# Altium PCB pcb403.PcbDoc
Units mil, origin at the board's own origin, x right, y up, seen from the top; angles counter-clockwise.
Board outline 6000 x 4000 mil, 2 copper layers (Top Layer, Bottom Layer); 42 components, 24 nets, 116 pads, 22 vias.
Unrouted connection lines stored in the file: 20.
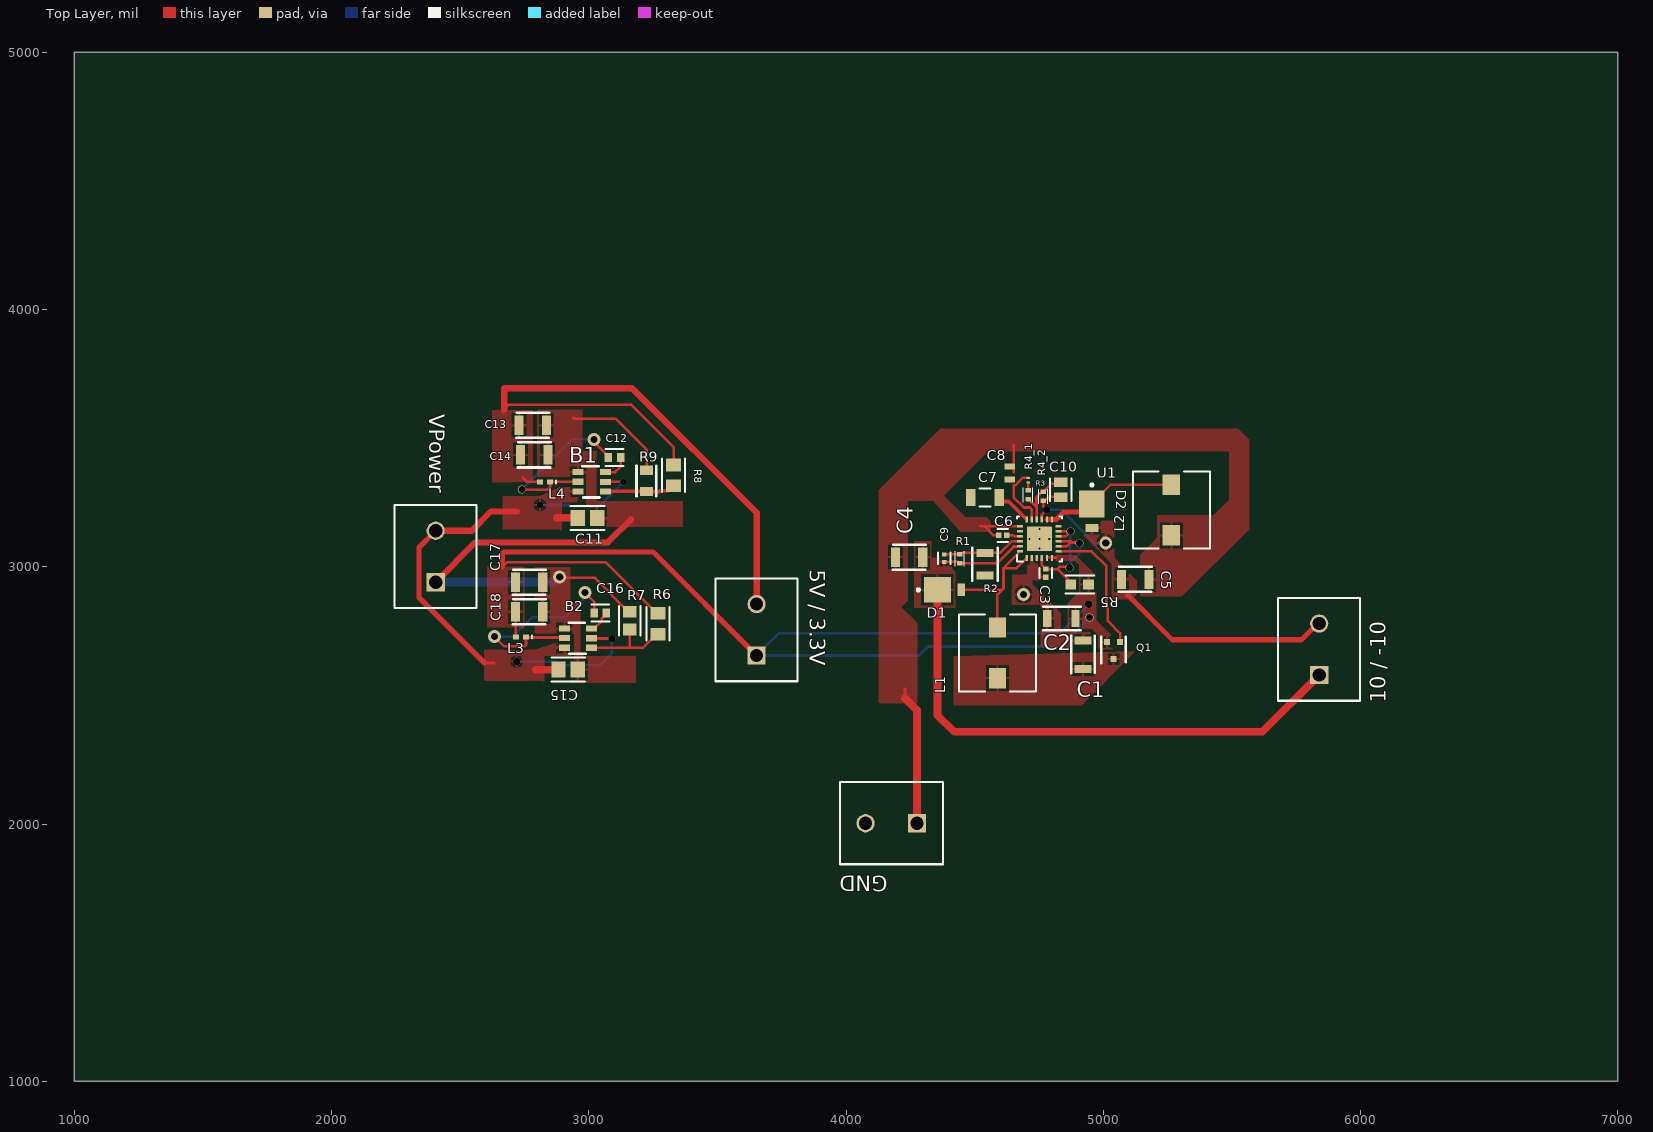
[diagram p0: Top Layer view]
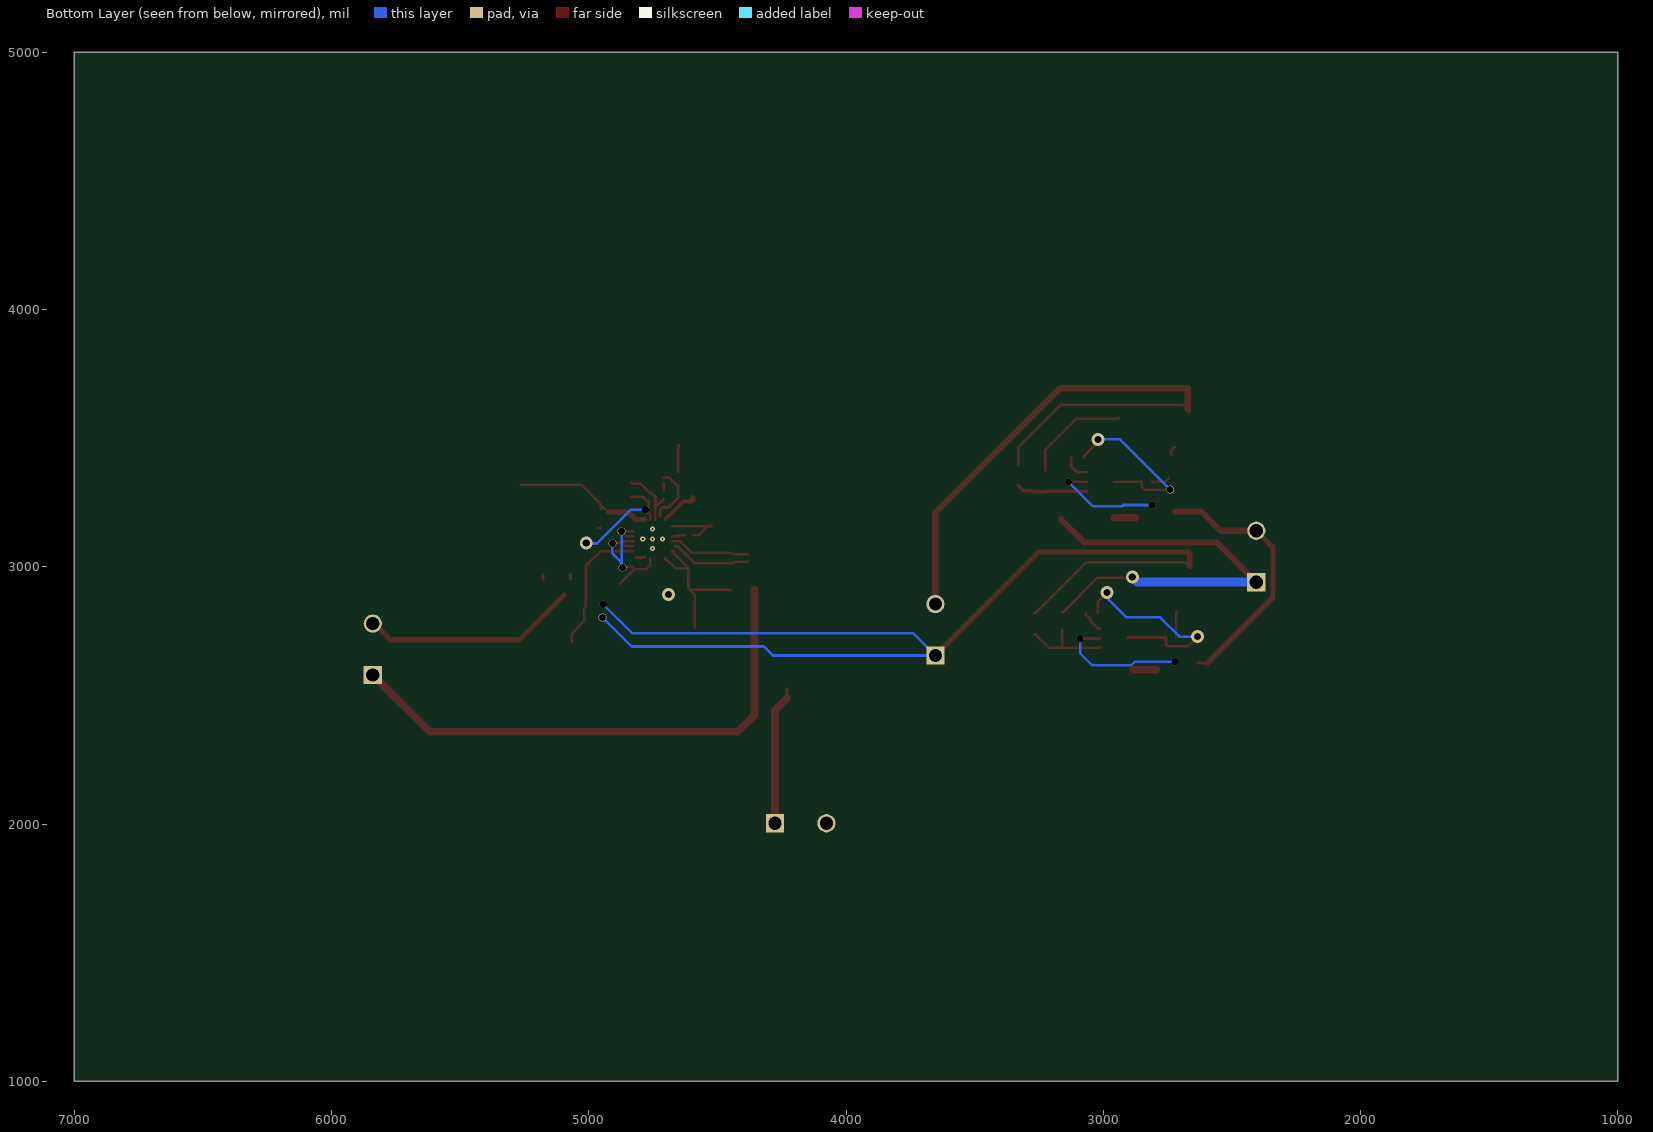
[diagram p1: Bottom Layer view, seen from below]

## Layer stack, top to bottom
Top Solder: solder mask 0.4, Solder Resist, Dk 3.5
Top Layer: signal copper 1.4
Dielectric 1: dielectric 12.6, FR-4, Dk 4.8
Bottom Layer: signal copper 1.4
Bottom Solder: solder mask 0.4, Solder Resist, Dk 3.5

## Board outline
1000,1000 7000,1000 7000,5000 1000,5000

## Design rules (kind name [scope] priority, off if disabled: settings)
Clearance [All] p1: gap=10 ignorepadtopadclearanceinfootprint=FALSE except(0: Arc-Hole Track-Hole SMDPad-Hole THPad-Hole Via-Hole Fill-Hole Poly-Hole Region-Hole Text-Hole)
PolygonConnect [All] p1: connectstyle=Relief reliefconductorwidth=10 reliefentries=4 polygonreliefangle="90 Angle" airgapwidth=10
RoutingVias [All] p1: holewidth=28 width=50 viastyle="Through Hole" minholewidth=28 minwidth=50 maxholewidth=28 maxwidth=50
SolderMaskExpansion [All] p1: expansion=4 istentingtop=FALSE
Width [All] p1: maxlimit=30 minlimit=5 preferedwidth=6 minimp=50.000000 maximp=50.000000 favimp=50.000000
30 further rules are at their usual default settings.

## Components (designator, comment, footprint, x,y, rotation, side; value= is the part's Value field where it differs from the comment)
"5V / 3.3V" "Comment" PHOE-1729128-2_V 3652.56,2754.92 r90 top
"10 / -10" "Comment" PHOE-1729128-2_V 5839.57,2679.13 r90 top
B1 "" PCBCOMPONENT_1 2958.7,3367.8 r0 top
B2 "" PCBCOMPONENT_1 2905,2760 r0 top
C1 "Comment" 4.7uF_C1206C475K3RACAUTO 4921.26,2712.6 r0 top
C2 "Comment" 4.7uF_C1206C475K3RACAUTO 4892.72,2799.21 r270 top
C3 "C0402C104K8PAC" FP-C0402-BB-MFG 4776.57,2975.39 r270 top value="0.10 μF"
C4 "Comment" Cap22uF_C1206C226M4PAC7800 4191.93,3037.4 r90 top
C5 "Comment" Cap22uF_C1206C226M4PAC7800 5177.17,2950.79 r270 top
C6 "C0402C103J4RAC" FP-C0402-BB-MFG 4609.25,3122.05 r180 top value="10,000 pF"
C7 "C1206C472J5GAC" FP-C1206C-EB-MFG 4540.35,3269.69 r180 top value="4,700 pF"
C8 "Comment" PCBComponent_1#1 4636.81,3389.99 r0 top
C9 "CGA1A2C0G1E6R8D030BA" FP-CGA1A-0_1-0_03-IPC_B 4381.73,3033.7 r90 top
C10 "C0805C759D5GACTU" FP-C0805C-DN-MFG 4834.65,3299.21 r270 top value="7.5 pF"
C11 "UMK212BBJ225MD-T" FP-0805-L_2_0_0_2-W_1_25-IPC_A 2995,3190 r0 top
C12 "C0603C104K4PAC7867" FP-C0603C-CF-MFG 3100,3425 r180 top value="0.10 μF"
C13 "Comment" Cap22uF_C1206C226M4PAC7800 2728.7,3550 r90 top
C14 "Comment" Cap22uF_C1206C226M4PAC7800 2735,3435 r90 top
C15 "UMK212BBJ225MD-T" FP-0805-L_2_0_0_2-W_1_25-IPC_A 2920,2600 r0 top
C16 "C0603C104K4PAC7867" FP-C0603C-CF-MFG 3045,2820 r0 top value="0.10 μF"
C17 "Comment" Cap22uF_C1206C226M4PAC7800 2715,2940 r90 top
C18 "Comment" Cap22uF_C1206C226M4PAC7800 2715,2825 r90 top
D1 "MBRM120ET3G" ONSC-POWERMITE-2-457-04_D_V 4407.87,2910.43 r0 top
D2 "MBRM120ET3G" ONSC-POWERMITE-2-457-04_D_V 4955.71,3190.94 r270 top
GND "Comment" PHOE-1729128-2_V 4176.18,2002.95 r180 top
L1 "7447789004" WE-PD-S-PB 4588.58,2665.35 r90 top
L2 "7447789004" WE-PD-S-PB 5264.76,3220.47 r90 top
L3 "MSS1260H-822MED" 0402-A 2736.22,2727.36 r180 top value=8.2uH
L4 "Inductor" 0402-A 2830,3330 r180 top value=10uH
Q1 "Comment" PCBComponent_1#2 5040.35,2707.68 r0 top
R1 "Comment" 1Mohm_ESR01MZPF1004 4441.73,3048.7 r0 top
R2 "Comment" 130k_RGV3216P-1303-B-T1 4540.35,3053.15 r0 top
R3 "Comment" 1Mohm_ESR01MZPF1004 4766.73,3291.34 r0 top
R4_1 "Comment" 121k_RE0201BRE07121KL 4707.68,3344.58 r0 top
R4_2 "Comment" 200ohm_ESR01MZPF2000 4707.68,3297.24 r0 top
R5 "AC0603FR-10100RL" FP-AC0603-IPC_A 4908.46,2931.1 r180 top
R6 "RK73G2ATTD1003F" FP-RK73G2A-IPC_A 3268.7,2778.54 r270 top
R7 "RMCF0805FG22K1" FP-RMCF0805-IPC_B 3159.45,2790.35 r270 top
R8 "RK73G2ATTD1003F" FP-RK73G2A-IPC_A 3330,3355 r90 top
R9 "Comment" RMCF0805FT13K7_13.7k 3225,3292.32 r180 top
U1 "TPS6513x" RGE0024B_V 4751.73,3108.7 r90 top
VPower "Comment" PHOE-1729128-2_V 2405,3040 r90 top

## Footprints (in the part's own frame and the unit in brackets; to place one, negate y for a bottom-side part, rotate by r counter-clockwise, add the part's x,y. Pads: shape width x height; smd on the part's side, far side on the other; paste and mask are expansions set on the pad)
1Mohm_ESR01MZPF1004 [mm]
  rect 0.55x0.45 smd: 7(0,0) 8(0,-0.9)
  silkscreen extent -0.45,-1.17 0.45,0.28
4.7uF_C1206C475K3RACAUTO [mm]
  rect 1.7x0.8 smd: 13(0,0) 14(0,-2.8)
  silkscreen extent -1.15,-3.2 1.17,0.5
121k_RE0201BRE07121KL [mm]
  rect 0.35x0.2 smd: 9(0,0) 10(0,-0.42)
130k_RGV3216P-1303-B-T1 [mm]
  rect 1.65x0.8 smd: 5(0,0) 6(0,-2.2)
  silkscreen extent -1.25,-2.75 1.25,0.5
200ohm_ESR01MZPF2000 [mm]
  rect 0.55x0.45 smd: 7(0,0) 8(0,-0.9)
  silkscreen extent -0.45,-1.17 0.45,0.28
0402-A [mm] "Chip Inductor, Body 1.0x0.5mm, IPC High Density"
  rect 0.6x0.5 smd: 1(-0.5,0) 2(0.5,0)
  silkscreen extent -1.1,-0.15 -1.1,0.15, body extent -0.55,-0.3 0.55,0.3, height 0.55
Cap22uF_C1206C226M4PAC7800 [mm]
  rect 1.9x0.9 smd: 7(0,0) 8(0,-2.7)
  silkscreen extent -1.25,-2.98 1.22,0.28
FP-0805-L_2_0_0_2-W_1_25-IPC_A [mil]
  rect 55.42x61.5 smd paste+0 mask+0: 1(-37.49,0) 2(37.49,0)
  silkscreen extent -65,-46 65,46, body extent -85,-50 85,50, height 10
FP-AC0603-IPC_A [mil]
  rect 41.68x39.85 smd paste+0 mask+0: 1(-34.52,0) 2(34.52,0)
  silkscreen extent -55,-36 55,36, body extent -75,-40 75,40, height 10
FP-C0402-BB-MFG [mm]
  rect 0.52x0.52 smd paste+0 mask+0: 1(-0.4,0) 2(0.4,0)
  silkscreen extent -0.5,-0.64 0.5,0.64, body extent -0.8,-0.4 0.8,0.4, height 0.25
FP-C0603C-CF-MFG [mm]
  rect 0.75x0.9 smd paste+0 mask+0: 1(-0.6,0) 2(0.6,0)
  silkscreen extent -0.87,-0.85 0.88,0.85, body extent -1.2,-0.6 1.2,0.6, height 0.25
FP-C0805C-DN-MFG [mm]
  rect 0.95x1.35 smd paste+0 mask+0: 1(-0.75,0) 2(0.75,0)
  silkscreen extent -1.1,-1.07 1.1,1.07, body extent -1.4,-0.85 1.4,0.85, height 0.25
FP-C1206C-EB-MFG [mm]
  rect 0.95x1.7 smd paste+0 mask+0: 1(-1.4,0) 2(1.4,0)
  silkscreen extent -0.55,-0.9 0.55,0.9, body extent -2,-1 2,1, height 0.25
FP-CGA1A-0_1-0_03-IPC_B [mil]
  rect 15.08x16.46 smd paste+0 mask+0: 1(-14.47,0) 2(14.47,0)
  silkscreen extent -22,-24 22,24, body extent -28,-14 28,14, height 10
FP-RK73G2A-IPC_A [mil]
  rect 49.42x57.56 smd paste+0 mask+0: 1(-40.37,0) 2(40.37,0)
  silkscreen extent -65,-45 65,45, body extent -85,-48 85,48, height 10
FP-RMCF0805-IPC_B [mil]
  rect 45.46x53.63 smd paste+0 mask+0: 1(-34.48,0) 2(34.48,0)
  silkscreen extent -57,-43 57,43, body extent -67,-37 67,37, height 10
ONSC-POWERMITE-2-457-04_D_V [mil] "POWERMITE, 2-Leads, Body 1.965x1.9mm"
  rect 105.12x100 smd: 1(-52.56,0)
  rect 30x50 smd: 2(40,0)
  silkscreen extent -132,-5 -122,5, body extent -80,-37 -3,37, height 45
PCBCOMPONENT_1 [mm]
  rect 1.1x0.6 smd: 1(0,0) 2(0,-0.95) 3(0,-1.9) 4(2.7,-1.9) 5(2.7,-0.96) 6(2.7,0)
  silkscreen extent 0.43,-2.5 2.11,0.57
PCBComponent_1#1 [mm]
  rect 1x0.6 smd: 1(0,0) 2(0,-1.3)
PCBComponent_1#2 [mm]
  rect 0.6x0.6 smd: 15(-0.65,0) 16(0.65,0) 17(0,-1.7)
  silkscreen extent -1.2,-2.1 1.2,0.5
PHOE-1729128-2_V [mm] "Receptacle, 2-Leads, Body 8.1x10.16mm, Pitch 5.08mm"
  rect 1.8x1.8 hole 1.3: 1(-2.54,0)
  round 1.8 hole 1.3: 2(2.54,0)
  silkscreen extent -5.08,-4.05 5.08,4.05, body extent -5.65,-4.05 5.08,4.05, height 10.01
RGE0024B_V [mm] "QFN, 24-Leads, Body 4x4mm, Pitch 0.5mm, Thermal Pad 2.45x2.45mm"
  rrect42% 0.24x0.6 smd: 19(1.25,1.9) BSW(-1.25,-1.9) CP(0.25,1.9) ENN(0.25,-1.9) ENP(-0.75,-1.9) FBP(-0.25,1.9) INP(-1.25,1.9) NC(0.75,1.9) NC(1.25,-1.9) PSN(0.75,-1.9) PSP(-0.25,-1.9) Vpos(-0.75,1.9)
  rrect4% 2.45x2.45 smd paste-1.225: 25(0,0)
  rrect42% 0.6x0.24 smd: CN(1.9,1.25) FBN(1.9,0.25) INN(-1.9,-1.25) INN(-1.9,-0.75) INP(-1.9,1.25) OUTN(1.9,-1.25) OUTN(1.9,-0.75) PGND(-1.9,0.25) PGND(-1.9,0.75) Vin(-1.9,-0.25) VNEG(1.9,-0.25) VREF(1.9,0.75)
  silkscreen extent -2.22,-2.22 2.22,2.22, body extent -2.07,-2.07 2.07,2.07, height 1.01
RMCF0805FT13K7_13.7k [mm]
  rect 1.3x0.9 smd: 9(0,0) 10(0,-2.1)
  silkscreen extent -0.95,-2.55 1,0.45
WE-PD-S-PB [mm] "SMD Inductor, 2-Leads, Body 7.3x7.3x3.5 mm"
  rect 2x1.7 smd: 1(-2.5,0) 2(2.5,0)
  silkscreen extent -3.8,-3.8 3.8,3.8, body extent -3.65,-3.65 3.65,3.65, height 3.19

## Part data
B1 B2: library part Component_1
C1 C2 C4 C5 C8 C13 C14 C17 C18: library part Cap, "Capacitor"
C3: library part CMP-03020-000918-1, "C0402 0.10 μF X5R 10.00% 10 V", Capacitance="0.10 μF", Manufacturer=Kemet, Package=C0402-BB, Temperature="-55°C to +125°C", Temperature Characteristic=X5R, Temperature Coefficient=15%, Temperature Range High=+125°C, Temperature Range Low=-55°C, Tolerance=0.1, Voltage Rating="10 V", Automotive=No, Category=Cap, ComponentLink2Description=Datasheet, ComponentLink2URL=https://content.kemet.com/datasheets/KEM_C1002_X7R_SMD.pdf, Device Class L1="Passive Components", Device Class L2=Capacitors, Device Class L3="Ceramic Capacitors", Height=0.55mm, Ipc Land Pattern Name=CAPC10050X50, Lead Free=Yes, Manufacturer Part Number=C0402C104K8PAC, Material=Ceramic, Mouser Description="Cap-fxd 0.1UF +-10PCT 10V Cer X5R 0402 S", Octopart=https://octopart.com/c0402c104k8pac-kemet-2645080, RoHS=TRUE
C6: library part CMP-03020-009089-1, "C0402 10,000 pF X7R 5.00% 16 V", Capacitance="10,000 pF", Manufacturer=Kemet, Package=C0402-BB, Temperature="-55°C to +125°C", Temperature Characteristic=X7R, Temperature Coefficient=15%, Temperature Range High=+125°C, Temperature Range Low=-55°C, Tolerance=0.05, Voltage Rating="16 V", Automotive=No, Category=Cap, ComponentLink2Description=Datasheet, ComponentLink2URL=https://content.kemet.com/datasheets/KEM_C1002_X7R_SMD.pdf, Device Class L1="Passive Components", Device Class L2=Capacitors, Device Class L3="Ceramic Capacitors", Height=0.55mm, Ipc Land Pattern Name=CAPC10050X50, Lead Free=Yes, Manufacturer Part Number=C0402C103J4RAC, Material=Ceramic, Mouser Description="Multilayer Ceramic Capacitors MLCC - SMD/SMT 16volts 0.01uF 5% X7R", Octopart=https://octopart.com/c0402c103j4rac-kemet-8293494, RoHS=TRUE
C7: library part CMP-03020-017963-1, "C1206 4,700 pF C0G 5.00% 50 V", Capacitance="4,700 pF", Manufacturer=KEMET, Package=C1206C-EB, Temperature="-55°C to +150°C", Temperature Characteristic=C0G, Temperature Coefficient=15%, Temperature Range High=+150°C, Temperature Range Low=-55°C, Tolerance=0.05, Voltage Rating="50 V", Automotive=Yes, Automotive Grade="Grade 0", Category=Cap, ComponentLink2Description=Datasheet, ComponentLink2URL=https://content.kemet.com/datasheets/KEM_C1007_X8R_ULTRA_150C_SMD.pdf, Device Class L1="Passive Components", Device Class L2=Capacitors, Device Class L3="Ceramic Capacitors", Height=0.88mm, Ipc Land Pattern Name=CAPC320160X78, Lead Free=Yes, Manufacturer Part Number=C1206C472J5GAC, Material=Ceramic, Mouser Description="Multilayer Ceramic Capacitors MLCC - SMD/SMT 50volts 4700pF 5% C0G", Octopart=https://octopart.com/c1206c472j5gac-kemet-1350327, RoHS=TRUE
C9: library part CMP-08246-001552-1, "Cap Ceramic 6.8pF 25V C0G 0.5pF Pad SMD 0201 125°C Automotive T/R", Capacitance=6.8pF, Case Code (Imperial)=0201, Case Code (Metric)=0603, Dielectric=C0G, Max Operating Temperature=125°C, Min Operating Temperature=-55°C, Package Quantity=1, Ratings=AEC-Q200, Voltage Rating=25V, Case/Package=0201, Composition=Ceramic, Depth=0.3mm, Height=0.3mm, Length=0.6mm, Mount="Surface Mount", Packaging="Tape and Reel", Termination=SMD/SMT, Thickness=0.013inch, Voltage Rating (DC)=25V, Weight=6E-06oz, Width=0.012inch
C10: library part CMP-1036-00734-2, "CAP CER 7.5PF 50V NP0 0805", Capacitance="7.5 pF", Manufacturer=KEMET, Package=C0805C-DN, Temperature="-55°C to +125°C", Temperature Characteristic=C0G, Temperature Coefficient=30ppm/°C, Temperature Range High=+125°C, Temperature Range Low=-55°C, Tolerance="0.5 pF", Voltage Rating="50 V", Automotive=No, Category=Cap, ComponentLink2Description=Datasheet, ComponentLink2URL=https://content.kemet.com/datasheets/KEM_C1003_C0G_SMD.pdf, Device Class L1="Passive Components", Device Class L2=Capacitors, Device Class L3="Ceramic Capacitors", Digikey Description="CAP CER 7.5PF 50V NP0 0805", Height=0.88mm, Ipc Land Pattern Name=CAPC200125X78, Lead Free=Yes, Manufacturer Part Number=C0805C759D5GACTU, Material=Ceramic, Mouser Description="Multilayer Ceramic Capacitors MLCC - SMD/SMT 50volts 7.5pF C0G 0.5%", Octopart=https://octopart.com/c0805c759d5gactu-kemet-17134963, RoHS=TRUE
C11 C15: library part CMP-14477-004278-2, "Multilayer Ceramic Capacitor 2.2uF 50V X5R 20% SMD 0803 T/R", Capacitance=2.2uF, Case Code (Imperial)=0805, Case Code (Metric)=2012, Max Operating Temperature=85°C, Min Operating Temperature=-55°C, Tolerance=20%, Voltage Rating=50V, Case/Package=0805, Mount="Surface Mount", Packaging="Tape and Reel", RoHS Compliant=Yes
C12 C16: library part CMP-03020-002384-2, "CAP CER 0.1UF 16V X5R 0603", Capacitance="0.10 μF", Manufacturer=KEMET, Package=C0603C-CF, Temperature="-55°C to +125°C", Temperature Characteristic=X5R, Temperature Coefficient=30ppm/°C, Temperature Range High=+125°C, Temperature Range Low=-55°C, Tolerance=0.1, Voltage Rating="16 V", Automotive=Yes, Automotive Grade="Grade 1", Category=Cap, ComponentLink2Description=Datasheet, ComponentLink2URL=https://api.kemet.com/component-edge/download/datasheet/C0603C100J5GACAUTO.pdf, Device Class L1="Passive Components", Device Class L2=Capacitors, Device Class L3="Ceramic Capacitors", Digikey Description="CAP CER 0.1UF 16V X5R 0603", Height=0.87mm, Lead Free=Yes, Manufacturer Part Number=C0603C104K4PAC7867, Material=Ceramic, Octopart=https://octopart.com/c0603c104k4pactu-kemet-12592163, RoHS=TRUE
D1 D2: library part CMP-1055-00280-1, "Schottky Power Rectifier, 2-Pin Powermite, Pb-Free, Tape and Reel", Manufacturer="On Semiconductor", ComponentLink1Description="Manufacturer URL", ComponentLink1URL=http://www.onsemi.com/, ComponentLink2Description=Datasheet, ComponentLink2URL=http://www.onsemi.cn/pub_link/Collateral/MBRM120E-D.PDF, ComponentLink3Description="Package Specification", ComponentLink3URL=http://www.onsemi.com/pub_link/Collateral/457-04.PDF, Configuration=Single, DatasheetVersion="Rev. 3", IFSM Max (A)=50, Mounting Technology="Surface Mount", PackageDescription="2-Pin POWERMITE, Body 1.965 x 1.9 mm", PackageReference=POWERMITE-2-457-04, PackageVersion="Rev. F, 05/2013", Packing="Tape and Reel", PartNumber=MBRM120ET3G, RoHS=TRUE
L1 L2: library part CMP-1396-00050-1, "SMD-Shielded Power Inductor WE-PD, L=4.70 µH", Inductance="4.70 ÂµH", Manufacturer="Wuerth Elektronik", ComponentLink1Description="Manufacturer URL", ComponentLink1URL=http://www.we-online.com, ComponentLink2Description=Datasheet, ComponentLink2URL=http://www.we-online.de/katalog/media/pdf/7447789004.pdf, PackageDescription="SMD Inductor, 2-Leads, Body 7.3 x 7.3 mm", PackageReference=WE-PD-S-PB, PartNumber=7447789004
L3: library part Inductor, "Inductor", Code_IEC=1005, Code_JEITA=0402, LatestRevisionDate=29-May-2009, LatestRevisionNote="IPC-7351 Footprint Added.", PackageDescription="Chip Inductor", PackageReference=0402-A, Published=8-Jun-2000, Publisher="Altium Limited"
Q1: library part MOSFET-P, "P-Channel MOSFET"
R1 R2 R3 R4_1 R4_2 R9: library part Res1, "Resistor"
R5: library part CMP-03412-011629-2, "RES 100Ω 1.00% 0.1W 0603", Case/Package=0603, Resistance=100R, Tolerance=1%, RoHS Compliant=Yes
R6 R8: library part CMP-04015-080178-1, "100kΩ ±1% 0.125W Chip Resistor 0805 Thick Film AEC-Q200 Qualified", Case Code (Imperial)=0805, Case Code (Metric)=2012, Max Operating Temperature=125°C, Min Operating Temperature=-55°C, Power Rating=125mW, Resistance=100kR, Temperature Coefficient=50ppm/°C, Tolerance=1%, Voltage Rating=150V, Packaging="Tape and Reel", RoHS Compliant=Yes, Series=RK73G, Termination=SMD/SMT
R7: library part CMP-26527-006791-1, "22.1kΩ ±1% 0.125W 0805 Thick Film Chip Resistor AEC-Q200 compliant", Case Code (Imperial)=0805, Case Code (Metric)=2012, Max Operating Temperature=155°C, Max Power Dissipation=125mW, Min Operating Temperature=-55°C, Package Quantity=10000, Resistance=22.1kR, Resistor Type="Thick Film", Temperature Coefficient=100ppm/°C, Tolerance=1%, Case/Package=0805, Contact Plating=Tin, Features="Automotive AEC-Q200", Height=0.026inch, Lead Free="Lead Free", Length=0.079inch, Mount="Surface Mount", Number of Terminations=2, Packaging="Tape and Reel", Radiation Hardening=No, RoHS Compliant=Yes, Series=RMCF, Width=0.049inch
U1: library part CMP-0347-00005-4, "Boost Inverting Buck-Boost Voltage Converter with 2.7 to 5.5 V Input and -15 to 15 V Output, -40 to 85 degC, 24-Pin VQFN (RGE), Green (RoHS & no Sb/Br)", Manufacturer="Texas Instruments", PartNumber=TPS65130RGER, Switching Frequency(Typ)(kHz)=1400, Code_JEDEC=MO-220, ComponentLink1Description=Datasheet, ComponentLink1URL=http://www.ti.com/general/docs/lit/getliterature.tsp?genericPartNumber=TPS65130&fileType=pdf, ComponentLink2Description="Package Specification", ComponentLink2URL=http://www.ti.com/litv/pdf/mpqf124f, DatasheetVersion=SLVS493B, Eco-Plan="Green (RoHS & no Sb/Br)", Mounting Technology="Surface Mount", PackageDescription="24-Pin Plastic Quad Flatpack No-Lead, 4 x 4 mm Body, 0.5 mm Pitch", PackageReference=RGE0024B, PackageVersion="revG, Jul-2011", Regulated Outputs(#)=2, SubFamily="Step-Up Regulator", Topology="Boost, Inverting Buck-Boost", Vin(Max)(V)=5.5, Vin(Min)(V)=2.7, Vout2(V)="-15 to -2", Vout(Max)(V)=15, Vout(Min)(V)=-15
L4: Code_IEC=1005, Code_JEITA=0402, LatestRevisionDate=29-May-2009, LatestRevisionNote="IPC-7351 Footprint Added.", PackageDescription="Chip Inductor", PackageReference=0402-A, Published=8-Jun-2000, Publisher="Altium Limited"

## Via types
v1: diameter 30, hole 28, Top Layer to Bottom Layer, 6 vias
v2: diameter 50, hole 28, Top Layer to Bottom Layer, 6 vias
v3: diameter 19.68, hole 7.87, Top Layer to Bottom Layer, 5 vias
v4: diameter 28, hole 28, Top Layer to Bottom Layer, 5 vias

## Nets (pads, with @x,y where several pads share a name; then routed paths per layer and width w, separated by ;. In a path a pad name is that pad's centre, name@x,y a point inside that pad or via, vN(x,y) a via of type N, cw(c..) or ccw(c..) an arc to the next point about the centre after c; other vN are vias at no path point)
5V: "5V / 3.3V.2" C13.7 C14.7 L4.2 R8.2 | length 2544.4
  Top Layer w10: 2665,3600 2671.26,3606.26 2671.26,3611.26 2690,3630 3165,3630 3330,3465 R8.2 ; C14.7@2722.28,3465 2735,3452.28 C14.7 ; 2745,3345 2760,3330 L4.2
  Top Layer w25: 2671.26,3611.26 2671.26,3693.9 3168.31,3693.9 3652.56,3209.65 3652.56,2854.92
CB: B1.6 C12.1 | length 103.6
  Top Layer w10: B1.6 3102.8,3367.8 3123.62,3388.62 C12.1
CP: C6.1 U1.CP | length 53.3
  Top Layer w10: C6.1 4650.24,3122.05 4653.43,3118.86 U1.CP@4676.93,3118.86
FB: B1.4 R8.1 R9.9 | length 274.5
  Top Layer w10: R9.9@3224.33,3292.99 R9.9
  Top Layer w13.78: B1.4 R9.9@3224.33,3292.99 ; R9.9 3274.61,3292.32 3277.2,3294.92 3310.29,3294.92 R8.1
GND: B1.1 B2.1 C1.13 C2.14 C3.2 C4.7 C5.7 C6.2 C7.2 C8.1 C11.2 C13.8 C14.8 C15.2 C17.8 C18.8 GND.1 L2.1 R7.1 R9.10 U1.19 U1.PGND VPower.1 | length 3011.4
  Top Layer w10: v2@2893.7,2951.77 2898.62,2956.69 3023.51,2956.69 3155.36,2824.83 R7.1 ; 2940,3580 2945,3575 3105,3575 3225,3455 R9.10 ; 4229.33,2489.17 4229.33,2525.59 ; 4521.65,3159.45 4523.19,3157.91 U1.19 ; 4539.37,3156.5 4573.82,3122.05 C6.2 ; 4649.61,3472.44 4651.57,3470.47 4651.57,3368.11 ; C5.7 C5.7@5177.17,2970.47
  Top Layer w23.62: VPower.1 2559.49,3094.49 3074.49,3094.49 3165,3185
  Top Layer w30: 4229.33,2489.17 4276.18,2442.32 GND.1
  Bottom Layer w10: VPower.1 VPower.1@2425.63,2960.63
  Bottom Layer w35: VPower.1 2866.18,2940 v2(2886.81,2960.63)
  other v2: 4689.96,2892.72
NetB2_2: B2.2 C16.1 L3.1 | length 852
  Top Layer w10: v2(2633.86,2728.35) 2671.26,2690.94 2750.05,2690.94 2755.91,2696.8 L3.1 2758.29,2724.98 2902.62,2724.98 B2.2 ; v2(2985,2900) 3021.38,2863.62 C16.1
  Bottom Layer w10: v2(2633.86,2728.35) 2703.74,2728.35 2778.54,2803.15 2910.43,2803.15 2977.86,2870.57 2977.86,2892.86 v2(2985,2900)
NetB2_4: B2.4 R6.2 R7.2 | length 350.8
  Top Layer w10: B2.4 3157.48,2685.2 ; R7.2 3159.45,2687.17 3157.48,2685.2 ; R6.2 3264.63,2738.17 3211.65,2685.2 3157.48,2685.2
NetB2_6: B2.6 C16.2 | length 89.5
  Top Layer w10: B2.6 3021.14,2760 3051.14,2790 3051.14,2799.57 3068.62,2817.05 C16.2
NetC1_1: C1.14 L1.1 Q1.17
NetC2_1: "5V / 3.3V.1" C2.13 C17.7 C18.7 L3.2 Q1.15 R5.1 R6.1 U1.INN | length 4768.4
  Top Layer w10: 2663.88,2999.51 2681.1,3016.73 3066.81,3016.73 3264.63,2818.92 R6.1 ; 2663.88,3051.23 2669.74,3057.09 ; C18.7 2716.54,2823.46 L3.2 ; U1.INN@4781.5,3036.42 4800.67,3036.42 4800.94,3036.14 U1.INN@4800.94,3035.87 ; U1.INN@4800.94,3033.9 U1.INN@4800.94,3035.87 ; 4816.24,3036.14 4801.22,3036.14 U1.INN@4800.94,3035.87
  Top Layer w20: 2663.88,2999.51 2663.88,3051.23 ; 2669.74,3057.09 3250.39,3057.09 3652.56,2654.92
  Bottom Layer w10: v1(4943.9,2854.33) 4831.69,2742.13 3739.76,2742.13 3652.56,2654.92 4283.86,2654.92 4318.9,2689.96 4833.66,2689.96 v1(4946.85,2803.15)
NetC4_2: "10 / -10.1" C4.8 C9.1 D1.1 R1.8 U1.Vpos | length 2401.1
  Top Layer w10: C9.1 4433.8,3019.23 4439.76,3013.27 R1.8 4587.02,3013.27 4652.61,3078.86 4663.39,3078.86
  Top Layer w30: D1.1 4355.31,2423.23 4420.28,2358.27 5618.7,2358.27 5839.57,2579.13
NetC5_2: "10 / -10.2" C5.8 C10.2 D2.2 R3.8 U1.VNEG | length 1342.3
  Top Layer w10: U1.VNEG 4761.57,3202.52 v4(4780.51,3221.46) 4780.51,3221.85 4766.73,3235.63 R3.8 4773.3,3255.91 4789.27,3271.87 4832.46,3271.87 C10.2 ; D2.2 D2.2@4965.71,3150.94 ; v2@5002.19,3114.46 5002.19,3100.17 v2(5009.84,3092.52) ; C5.8 C5.8@5070.87,2970.47
  Top Layer w20: 5095.47,2889.76 5268.7,2716.54 5770.92,2716.54 5833.52,2779.13 5839.57,2779.13
  Bottom Layer w10: v4(4780.51,3221.46) 4837.6,3221.46 4968.5,3090.55 5007.87,3090.55 v2(5009.84,3092.52)
NetC7_1: C7.1 U1.CN | length 150.9
  Top Layer w10: 4695.71,3190.32 4702.24,3190.32 4702.52,3190.04 U1.CN
  Top Layer w15: C7.1@4604.17,3253.57 4632.46,3253.57 4695.71,3190.32
  Top Layer w20: C7.1 4595.47,3262.27 C7.1@4604.17,3253.57
NetC8_2: C8.2 R4_1.9 U1.VREF | length 232.3
  Top Layer w10: R4_1.9@4708.66,3345.28 4686.77,3345.28 4666.26,3324.76 4666.26,3323.74 4659.45,3316.93 4651.57,3316.93 4651.57,3270.13 4691.39,3230.32 4714.61,3230.32 4721.89,3223.04 4721.89,3196.78
NetC9_2: C9.2 R1.7 R2.5 U1.FBP | length 316.2
  Top Layer w10: C9.2 4382,3048.43 4441.47,3048.43 R1.7 4443.7,3048.7 4450.12,3055.12 4532.48,3055.12 4600.58,3055.12 4644.32,3098.86 U1.FBP
NetC10_1: C10.1 R3.7 R4_2.8 U1.FBN | length 250.8
  Top Layer w10: R4_2.8 4709.65,3261.81 4721.14,3250.32 4722.9,3250.32 4740.63,3232.58 ; U1.FBN 4741.89,3231.32 4740.63,3232.58 ; C10.1 4829.44,3323.54 4798.93,3323.54 R3.7 4762.87,3287.48 4757.41,3287.48 4740.63,3270.7 4740.63,3232.58
NetD1_2: D1.2 L1.2 U1.INP | length 605
  Top Layer w10: D1.2 4606.35,2910.43 ; L1.2 4588.58,2892.67 4606.35,2910.43 ; U1.INP@4676.93,3059.49 4670.39,3059.49 4670.12,3059.21 4670.12,3052.68 4612.2,2994.76 ; U1.INP@4702.52,3033.9 4702.52,3027.36 4702.24,3027.09 4695.71,3027.09 4663.39,2994.76 4612.2,2994.76 ; 4606.35,2910.43 4612.2,2916.29 4612.2,2994.76
NetD2_1: D2.1 L2.2 U1.OUTN | length 550
  Top Layer w10: D2.1@4924.8,3212.6 D2.1 4955.71,3246.06 5028.54,3318.9 L2.2 ; D2.1@4950.39,3225.39 D2.1@4956.69,3231.69
  Top Layer w20: U1.OUTN@4781.26,3183.5 4800.94,3183.5 4817.36,3183.5 4846.46,3212.6 D2.1@4924.8,3212.6
NetQ1_2: Q1.16 U1.BSW | length 526.4
  Top Layer w10: U1.BSW 4955.28,3059.49 5011.81,3002.95 5011.81,2845.42 5017.67,2839.57 5017.67,2789.42 5065.94,2741.14 Q1.16
NetR4_1_1: 
NetR5_2: C3.1 R5.2 U1.ENN U1.ENP U1.PSN U1.PSP U1.Vin | length 761.8
  Top Layer w10: U1.Vin 4761.57,3006.14 C3.1 4821.85,2991.14 ; U1.ENP@4826.54,3079.49 4857.79,3079.49 4872.79,3094.49 v1@4904.53,3094.49 ; U1.PSP 4826.57,3098.82 4872.79,3098.82 4877.48,3094.12 4904.16,3094.12 v1@4904.53,3094.49 ; U1.ENN 4852.8,3118.54 v1(4872.48,3138.23) U1.PSN ; v1(4869.09,2996.06) 4865.27,2999.89 4839.86,2999.89 4839.75,3000 4830.71,3000 4821.85,2991.14 ; R5.2@4877.92,2935.07 4821.85,2991.14 ; v1(4907.48,3091.54) v1@4904.53,3094.49
  Bottom Layer w10: v1@4861.22,3003.94 v1(4869.09,2996.06) ; v1(4872.48,3138.23) 4872.48,3005.3 4868.41,3001.23 4863.93,3001.23 4868.85,3001.23 4872.92,3005.3 4872.92,3011.7 4875.19,3013.97 4875.19,3019.38 4909.45,3053.64 4909.45,3089.57 v1(4907.48,3091.54)
Rconnect: R4_1.10 R4_2.7 | length 28
  Top Layer w10: R4_2.7 R4_1.10@4707.68,3325.28
SW: B1.2 C12.2 L4.1 | length 697.3
  Top Layer w10: v1(2740,3300) 2840,3300 2849.68,3309.68 L4.1 2849.88,3330.2 2958.5,3330.2 B1.2 ; v2(3020,3495) 3020,3484.33 3076.38,3427.95 C12.2
  Bottom Layer w10: v1(2740,3300) 2935,3495 v2(3020,3495)
Vin: B1.3 B1.5 B2.3 B2.5 C11.1 C15.1 VPower.2 | length 2170.7
  Top Layer w10: 2594.49,2625.98 2632.87,2625.98 ; 2793.31,2599.41 2793.9,2600 ; B2.5 3012.4,2721.1 3088.9,2721.1 v4(3090,2720) ; B1.5 v4(3135,3330)
  Top Layer w20: VPower.2 2339.57,3074.57 2339.57,2880.91 2594.49,2625.98
  Top Layer w23.62: VPower.2 2545,3140 2620,3215 2720,3215
  Top Layer w30: 2793.9,2600 C15.1 ; 2875,3190 C11.1
  Bottom Layer w10: v4(2719.77,2631) 2877.04,2631 2890.91,2617.13 3043.31,2617.13 3090,2663.82 v4(3090,2720) ; v4(2810,3240) 2922.44,3240 2927.44,3235 3040,3235 v4(3135,3330)
pads on no net: GND.2 R2.6 U1.25 U1.NC
copper on no net:
  other v3: 4751.73,3070.32 4713.35,3108.7 4751.73,3108.7 4790.12,3108.7 4751.73,3147.09

## Polygon pours and split planes (outlines as drawn)
GND on Top Layer "GND_L01_P000" (solid, pour order 0): 2800,3610 2800,3350 2975,3350 2975,3450 3030,3450 3030,3275 3025,3275 2990,3275 2990,3395 2975,3395 2975,3610
5V on Top Layer "5V_L01_P006" (solid, pour order 6): 2625,3607.5 2782.5,3607.5 2782.5,3342.5 2782.5,3329.73 2625,3326.63
Vin on Top Layer "VIN_L01_P007" (solid, pour order 7): 2665,3275 2810,3275 2885,3310 2960,3310 2960,3260 2950,3250 2895,3250 2895,3145 2890,3140 2885,3145 2665,3145
NetC2_1 on Top Layer "NETC2_1_L01_P011" (solid, pour order 11): 2605,3000 2750,3000 2750,2765 2745,2760 2740,2765 2605,2765
GND on Top Layer "GND_L01_P012" (solid, pour order 12): 2790,3000 2790,2745 2793.04,2741.96 2937.18,2741.96 2942.91,2736.22 2942.91,2647.64 2923.23,2627.95 2926.18,2625 2926.18,2548.23 3185.04,2548.23 3182.09,2551.18 3182.09,2651.57 2980.32,2651.57 2966.54,2665.35 2966.54,2857.28 2935.04,2857.28 2928.15,2864.17 2928.15,2999.02
GND on Top Layer "GND_L01_P024" (solid, pour order 24): 4276.57,2469.49 4276.57,2782.48 4215.55,2843.5 4239.17,2867.13 4239.17,3255.91 4360.24,3255.91 4553.15,3448.82 5489.17,3448.82 5489.17,3260.83 5429.13,3200.79 5209.65,3200.79 5209.65,3113.19 5141.73,3045.28 5144.69,3042.32 5144.69,2884.84 5306.1,2884.84 5567.91,3146.65 5567.91,3494.09 5525.59,3536.42 4366.14,3536.42 4127.95,3298.23 4127.95,2468.5
GND on Top Layer "GND_L01_P026" (solid, pour order 26): 4336.61,3259.84 4355.31,3268.7 4380.91,3276.57 4464.57,3192.91 4544.29,3192.91 4562.99,3174.21 4562.99,3136.81 4444.88,3136.81 4437.99,3143.7
NetC2_1 on Top Layer "NETC2_1_L01_P028" (solid, pour order 28): 4771.65,3050.2 4887.8,3050.2 4973.43,2964.57 4973.43,2792.32 5040.35,2725.39 5040.35,2678.15 4981.3,2678.15 4981.3,2734.25 4980.31,2734.25 4954.72,2759.84 4861.22,2759.84 4861.22,2857.28 4906.5,2902.56 4906.5,3006.89 4889.76,3023.62 4815.94,3023.62 4815.94,3022.64 4808.07,3014.76 4807.09,3015.75 4770.67,3015.75
GND on Top Layer "GND_L01_P022" (solid, pour order 22): 4756.4,2745.57 4757.87,2744.09 4757.87,2687.99 4758.86,2687.01 4974.41,2687.01 4974.41,2719.49 4946.85,2747.05
GND on Top Layer "GND_L01_P014" (solid, pour order 14): 4713.58,3053.15 4713.58,3005.47 4704.02,3005.47 4704.02,2947.83 4794.29,2945.87 4794.29,2974.96 4749.29,2974.96 4749.29,3053.15
NetC5_2 on Top Layer "NETC5_2_L01_P019" (solid, pour order 19): 4913.39,3178.15 5042.32,3178.15 5042.32,3034.45 5128.94,2947.83 5129.92,2947.83 5129.92,2892.72 5106.3,2869.09 5101.38,2874.02 5032.48,2874.02 5032.48,3011.81 4912.4,3131.89 4912.4,3176.18
NetC1_1 on Top Layer "NETC1_1_L01_P020" (solid, pour order 20): 4421.26,2651.57 4418.31,2648.62 4418.31,2462.6 4916.34,2462.6 5125.98,2672.24
GND on Top Layer "GND_L01_P021" (solid, pour order 21): 4645.67,2966.54 4648.62,2969.49 4724.41,2969.49 4724.41,2931.1 4835.63,2819.88 4835.63,2745.08 4756.89,2745.08 4755.91,2746.06 4755.91,2852.36 4646.65,2852.36 4644.69,2854.33
NetC4_2 on Top Layer "NETC4_2_L01_P023" (solid, pour order 23): 4264.76,3100.44 4264.76,2840.55 4424.21,2840.55 4424.21,2981.3 4409.45,2996.06 4409.45,3034.45 4334.65,3034.45 4331.69,3037.4 4331.69,3099.41
Vin on Top Layer "VIN_L01_P013" (solid, pour order 13): 2594.49,2677.17 2790.35,2677.17 2871.06,2703.74 2932.09,2703.74 2932.09,2662.4 2932.09,2653.54 2826.77,2653.54 2826.77,2550.2 2825.79,2549.21 2817.91,2557.09 2593.5,2557.09
GND on Top Layer "GND_L01_P010" (solid, pour order 10): 2990.35,3275 2990.35,3239.65 3000,3230 3000,3155 3365,3155 3365,3255 3030,3255 3030,3275